# Altium PCB STM32_USB四麦声卡_v6.0（H7 PDM接口）_2022-05-10.pcbdoc
Units mil, origin at the board's own origin, x right, y up, seen from the top; angles counter-clockwise.
Board outline 3650 x 3965.91 mil, 2 copper layers (Top Layer, Bottom Layer); 32 components, 46 nets, 226 pads, 158 vias.
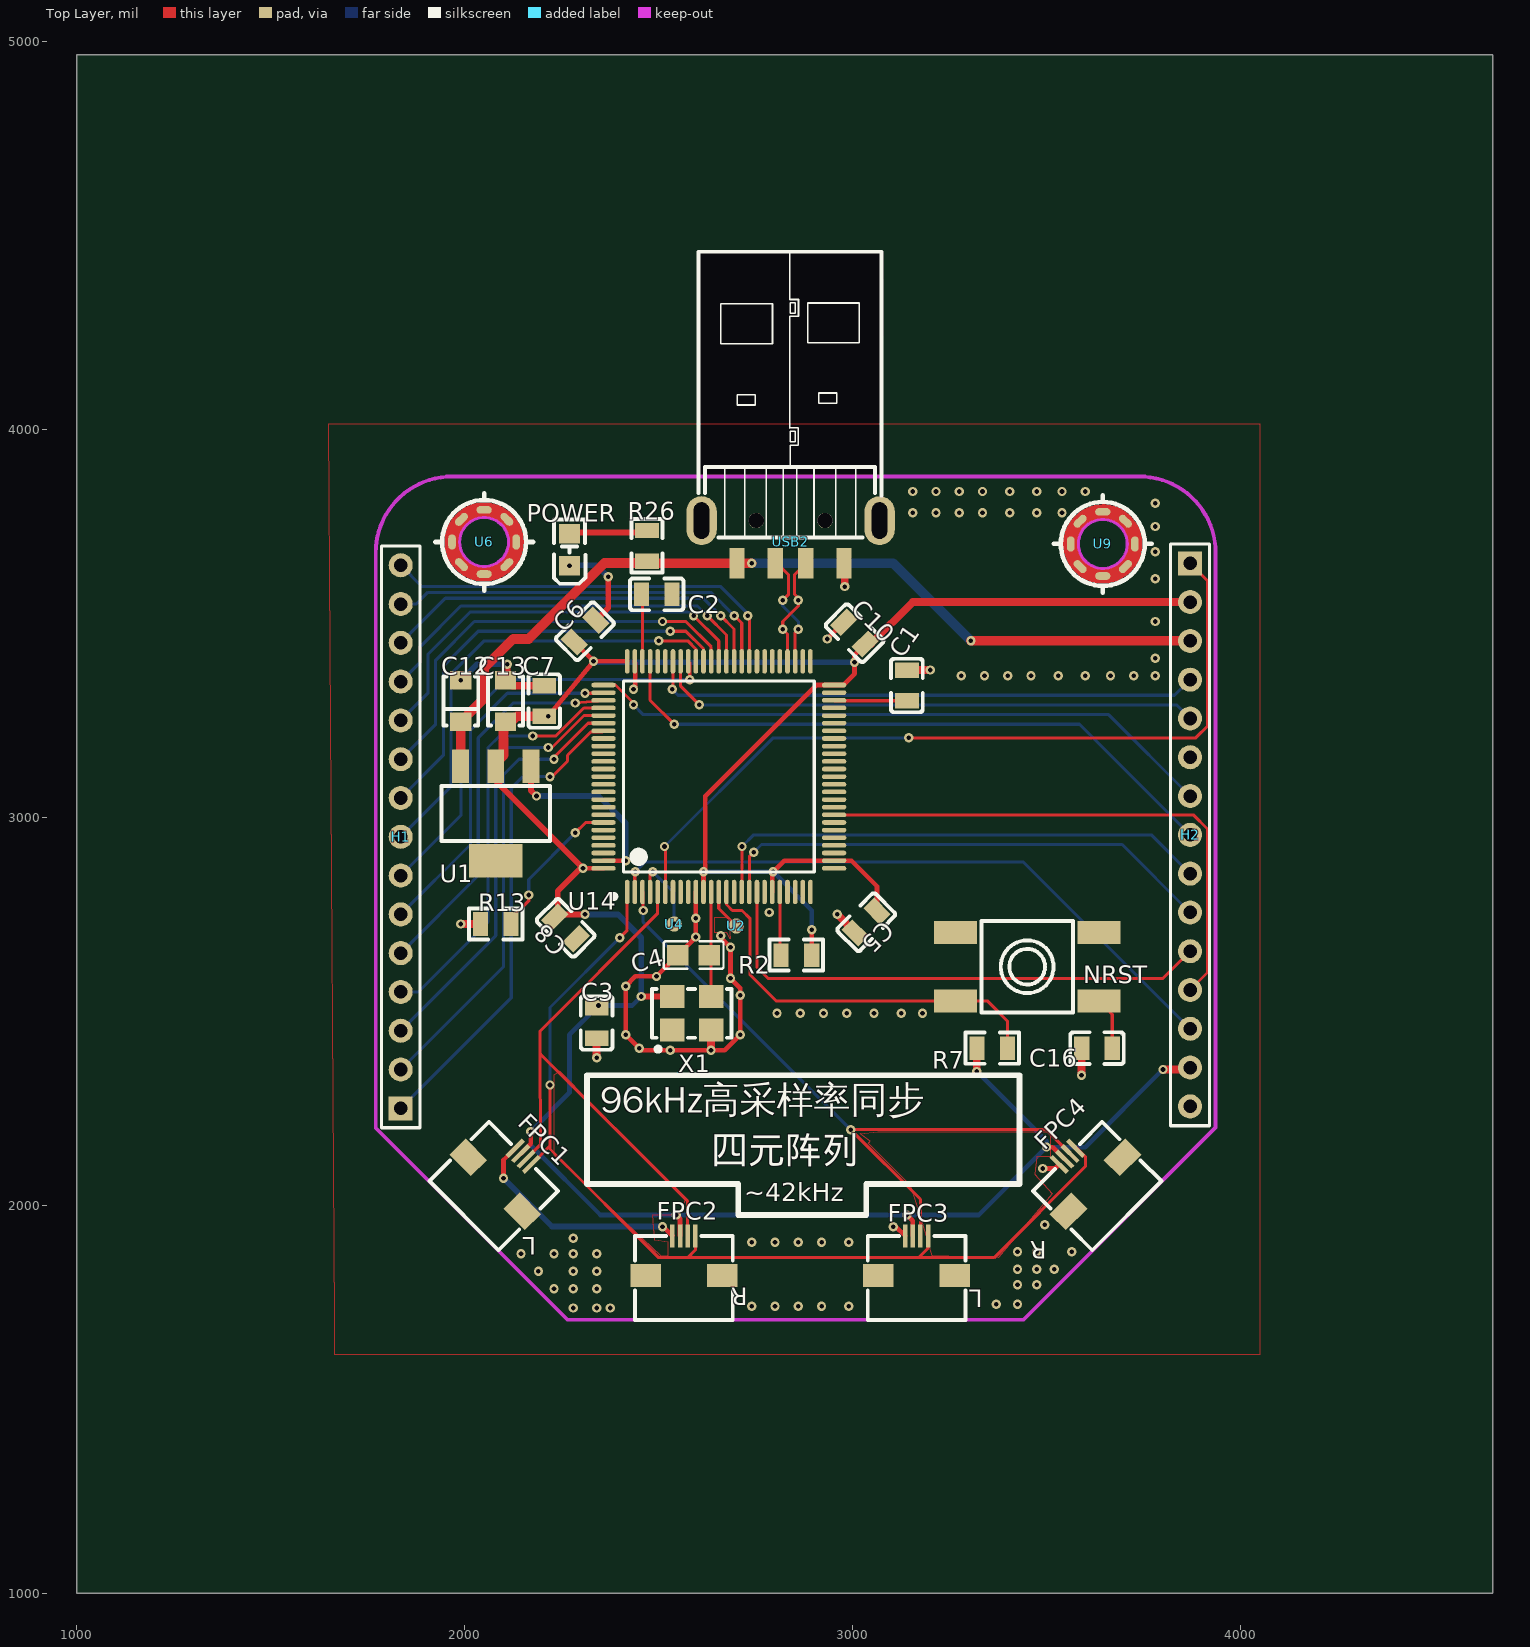
[diagram p0: Top Layer view]
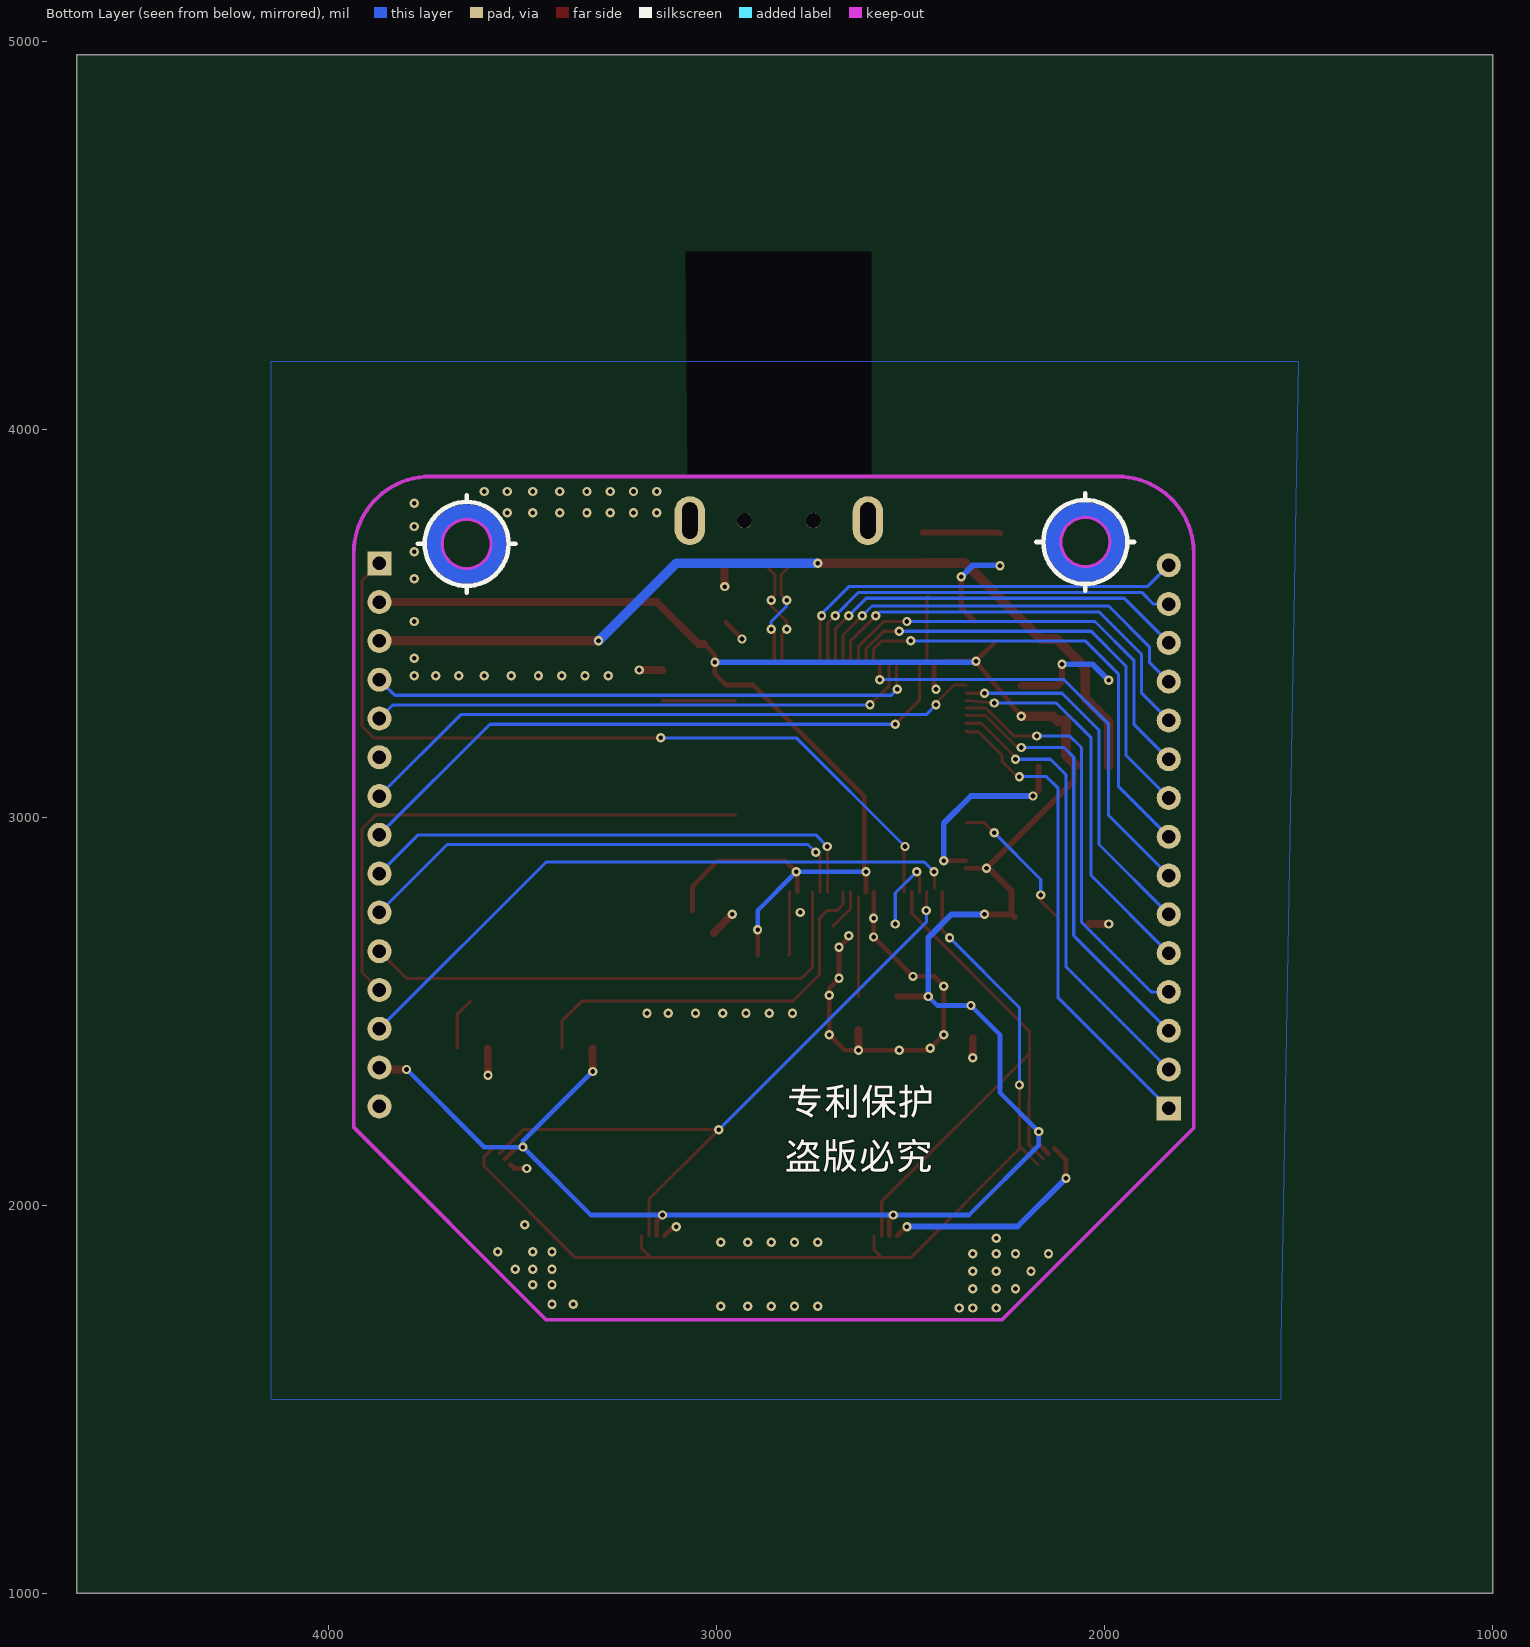
[diagram p1: Bottom Layer view, seen from below]

## Layer stack, top to bottom
Top Layer: signal copper (thickness not stored)
Dielectric: dielectric 12.6, FR-4, Dk 4.8
Bottom Layer: signal copper (thickness not stored)

## Board outline
4650,1000 1000,1000 1000,4965.91 4650,4965.91

## Components (designator, comment, footprint, x,y, rotation, side; value= is the part's Value field where it differs from the comment)
C1 "100nF" C0805#1 3140,3340 r270 top
C2 "100nF" C0805#1 2495,3575 r180 top
C3 "100nF" C0805#1 2340,2470 r90 top
C4 "15pF" C0805#2 2590,2645 r0 top
C5 "100nF" C0805#1 3035,2730 r45 top
C6 "100nF" C0805#1 2310,3480 r225 top
C7 "100nF" C0805#1 2205,3300 r270 top
C8 "100nF" C0805#1 2260,2715 r135 top
C10 "100nF" C0805#1 3005,3475 r315 top
C12 "10uF" CAP-SMD_L3.2-W1.6 1990,3300 r90 top
C13 "10uF" CAP-SMD_L3.2-W1.6 2105,3300 r90 top
C16 "100nF" C0805#1 3630,2405 r0 top
FPC1 "XW05200-04" FPC-SMD_4P-P0.50_XW05200-04 2115,2090 r315 top
FPC2 "XW05200-04" FPC-SMD_4P-P0.50_XW05200-04 2565,1870 r0 top
FPC3 "XW05200-04" FPC-SMD_4P-P0.50_XW05200-04 3165,1870 r0 top
FPC4 "XW05200-04" FPC-SMD_4P-P0.50_XW05200-04 3590,2090 r45 top
H1 "HDR-F-2.54_1x15" HDR-F-2.54_1X15 1835,2950 r90 top
H2 "HDR-F-2.54_1x15" HDR-F-2.54_1X15 3870,2955 r270 top
NRST "TS-1102S-C-E-B" KEY-SMD_4P-L6.0-W6.0-P4.50-LS8.6 3450,2615 r0 top
POWER "Green" LED0805-FD 2270,3690 r270 top
R2 "0" R0805 2855,2645 r180 top
R7 "10K" R0805 3360,2405 r0 top
R13 "10K" R0805 2080,2725 r0 top
R26 "1K" R0805 2470,3700 r270 top
U1 "AMS1117-3.3_C347222" SOT-223_L6.7-W3.5-P2.30-BR 2080,3010 r90 top
U2 "test" TEST 2700,2720 r0 top
U4 "test" TEST 2540,2725 r0 top
U6 "M3" M3-3 2050,3710 r0 top
U9 "M3" M3-3 3645,3705 r0 top
U14 "STM32H743VIT6_C114409" LQFP-100_L14.0-W14.0-P0.50-LS16.0-BL 2655,3105 r0 top
USB2 "U-G-04WS-W-03" USB-A-SMD_U-G-04WS-W-03 2840,3710 r90 top
X1 "24.576MHz" OSC-SMD_4P-L5.0-W3.2-BL_SG5032 2585,2495 r0 top

## Footprints (in the part's own frame and the unit in brackets; to place one, negate y for a bottom-side part, rotate by r counter-clockwise, add the part's x,y. Pads: shape width x height; smd on the part's side, far side on the other; paste and mask are expansions set on the pad)
C0805#1 [mm]
  rect 1x1.55 smd: 1(-1,0) 2(1,0)
  silkscreen extent -1.75,-1.04 1.75,1.04
C0805#2 [mm]
  rect 1.41x1.35 smd: 1(-1.03,0) 2(1.03,0)
  silkscreen extent -1.96,-0.9 1.96,0.9
CAP-SMD_L3.2-W1.6 [mm]
  rect 1.2x1.4 smd: 1(-1.35,0) 2(1.35,0)
  silkscreen extent -1.6,-1.14 1.6,1.14
FPC-SMD_4P-P0.50_XW05200-04 [mm]
  rect 0.3x1.5 smd: 1(0.75,1.3) 2(0.25,1.3) 3(-0.25,1.3) 4(-0.75,1.3)
  rect 2x1.5 smd: 5(-2.5,-1.3) 6(2.5,-1.3)
  silkscreen extent -3.2,-4.2 3.2,1.3
HDR-F-2.54_1X15 [mil]
  rect 62x62 hole 35: 1(-700,0)
  round 62 hole 35: 2(-600,0) 3(-500,0) 4(-400,0) 5(-300,0) 6(-200,0) 7(-100,0) 8(0,0) 9(100,0) 10(200,0) 11(300,0) 12(400,0) 13(500,0) 14(600,0) 15(700,0)
  silkscreen extent -750,-50 750,50
KEY-SMD_4P-L6.0-W6.0-P4.50-LS8.6 [mm]
  rect 2.8x1.5 smd: 1(-4.7,2.25) 2(4.7,2.25) 3(-4.7,-2.25) 4(4.7,-2.25)
  silkscreen extent -3,-3 3,3
LED0805-FD [mil]
  rect 51.2x55.1 smd: 1(-41.35,0) 2(41.35,0)
  silkscreen extent -78,-40 88,41
LQFP-100_L14.0-W14.0-P0.50-LS16.0-BL [mm]
  oval 0.3x1.6 smd: 1(-6,-7.55) 2(-5.5,-7.55) 3(-5,-7.55) 4(-4.5,-7.55) 5(-4,-7.55) 6(-3.5,-7.55) 7(-3,-7.55) 8(-2.5,-7.55) 9(-2,-7.55) 10(-1.5,-7.55) 11(-1,-7.55) 12(-0.5,-7.55) 13(0,-7.55) 14(0.5,-7.55) 15(1,-7.55) 16(1.5,-7.55) 17(2,-7.55) 18(2.5,-7.55) 19(3,-7.55) 20(3.5,-7.55) 21(4,-7.55) 22(4.5,-7.55) 23(5,-7.55) 24(5.5,-7.55) 25(6,-7.55) 51(6,7.55) 52(5.5,7.55) 53(5,7.55) 54(4.5,7.55) 55(4,7.55) 56(3.5,7.55) 57(3,7.55) 58(2.5,7.55) 59(2,7.55) 60(1.5,7.55) 61(1,7.55) 62(0.5,7.55) 63(0,7.55) 64(-0.5,7.55) 65(-1,7.55) 66(-1.5,7.55) 67(-2,7.55) 68(-2.5,7.55) 69(-3,7.55) 70(-3.5,7.55) 71(-4,7.55) 72(-4.5,7.55) 73(-5,7.55) 74(-5.5,7.55) 75(-6,7.55)
  oval 1.6x0.3 smd: 26(7.55,-6) 27(7.55,-5.5) 28(7.55,-5) 29(7.55,-4.5) 30(7.55,-4) 31(7.55,-3.5) 32(7.55,-3) 33(7.55,-2.5) 34(7.55,-2) 35(7.55,-1.5) 36(7.55,-1) 37(7.55,-0.5) 38(7.55,0) 39(7.55,0.5) 40(7.55,1) 41(7.55,1.5) 42(7.55,2) 43(7.55,2.5) 44(7.55,3) 45(7.55,3.5) 46(7.55,4) 47(7.55,4.5) 48(7.55,5) 49(7.55,5.5) 50(7.55,6) 76(-7.55,6) 77(-7.55,5.5) 78(-7.55,5) 79(-7.55,4.5) 80(-7.55,4) 81(-7.55,3.5) 82(-7.55,3) 83(-7.55,2.5) 84(-7.55,2) 85(-7.55,1.5) 86(-7.55,1) 87(-7.55,0.5) 88(-7.55,0) 89(-7.55,-0.5) 90(-7.55,-1) 91(-7.55,-1.5) 92(-7.55,-2) 93(-7.55,-2.5) 94(-7.55,-3) 95(-7.55,-3.5) 96(-7.55,-4) 97(-7.55,-4.5) 98(-7.55,-5) 99(-7.55,-5.5) 100(-7.55,-6)
  silkscreen extent -7.03,-8 6.25,6.25
M3-3 [mm]
  oval 0.5x1 smd: ""(-2.1,0) ""(2.1,0)
  oval 1x0.5 smd rot 45: ""(-1.485,1.485) ""(1.485,-1.485)
  oval 1x0.5 smd rot 135: ""(-1.485,-1.485) ""(1.485,1.485)
  oval 1x0.5 smd: ""(0,2.1) ""(0,-2.1)
  Top Layer circle w1: c0,0 r2.1
  Bottom Layer circle w1: c0,0 r2.1
  Keep-Out Layer circle w0.2: c0,0 r1.6
  silkscreen extent -3.2,-3.2 3.2,3.2
OSC-SMD_4P-L5.0-W3.2-BL_SG5032 [mm]
  rect 1.6x1.5 smd: 1(-1.27,-1.1) 2(1.27,-1.1) 3(1.27,1.1) 4(-1.27,1.1)
  silkscreen extent -2.6,-2.5 2.6,1.6
R0805 [mm]
  rect 1x1.55 smd: 1(-1,0) 2(1,0)
  silkscreen extent -1.75,-1.02 1.75,1.02
SOT-223_L6.7-W3.5-P2.30-BR [mm]
  rect 2.2x1.1 smd: 1(3.099,-2.3) 2(3.099,0) 3(3.099,2.3)
  rect 2.2x3.5 smd: 4(-3.099,0)
  silkscreen extent -1.8,-3.55 1.8,3.55
TEST [mm]
  round 1 smd: 1(0,0)
USB-A-SMD_U-G-04WS-W-03 [mm]
  rect 2x1 smd: 1(-1.4,3.5) 2(-1.4,1) 3(-1.4,-1) 4(-1.4,-3.5)
  oval 3.2x2 hole 1 slot 2.4 at 0 deg: 5(1.4,5.829) 6(1.4,-5.829)
  round 1 hole 1 unplated: ""(1.4,2.25) ""(1.4,-2.25)
  Multi-Layer board cut-out: 4.252,-5.981 4.252,6.043 4.267,6.058 19.002,6.058 19.002,-6.023 19.075,-6.096
  silkscreen extent 0.28,-5.97 19.03,6.03

## Via types
v1: diameter 24, hole 12, Top Layer to Bottom Layer, tented both sides, 158 vias

## Nets (pads, with @x,y where several pads share a name; then routed paths per layer and width w, separated by ;. In a path a pad name is that pad's centre, name@x,y a point inside that pad or via, vN(x,y) a via of type N, cw(c..) or ccw(c..) an arc to the next point about the centre after c; other vN are vias at no path point)
5V_USB: C12.1 H2.3 R26.2 U1.3 USB2.1 | length 2287.8
  Top Layer w25: U1.3@1989.5,3132 1990,3246.9 2050,3306.9 2050,3385 2125,3460 2165,3460 2360.6,3655.6 2470,3655.6 USB2.1@2697.2,3654.9 ; USB2.1 v1(2740,3655) ; v1(3305,3455) H2.3
  Bottom Layer w25: v1(2740,3655) 3105,3655 v1(3305,3455)
+3V3: C3.2 C5.2 C6.2 C7.2 C8.2 C10.2 C13.1 FPC1.3 FPC2.3 FPC3.3 FPC4.3 H2.2 H2.14 R2.1 R7.1 U1.2 U14.11 U14.20 U14.27 U14.50 U14.75 U14.100 X1.4 | length 7962
  Top Layer w12: FPC1.3 2170,2158.9 v1(2170,2190) ; v1(2215,3260.63) v1(2332.08,3402.24) ; C6.2 v1(2332.08,3402.24) ; v1(2305,2868.78) U14.100 ; U14.75 v1(2332.08,3402.24) ; v1(2545,1975) 2555.16,1964.85 FPC2.3 ; U14.11 v1(2615.63,2860) 2620,2864.37 2620,3055 2906.22,3341.22 U14.50 2976.22,3341.22 3005,3370 3005,3419.32 C10.2 ; U14.20 2792.8,2857.8 v1(2795,2860) 2823.46,2888.46 U14.27 ; R2.1 v1(2895,2710) ; U14.27 2997.2,2888.5 3062.8,2822.8 C5.2 ; v1(3140,1975) 3155.16,1959.85 FPC3.3 ; v1(3500,2150) 3516.08,2150 FPC4.3
  Top Layer w15: U1.2 2080,3093.8 v1(2305,2868.78) 2298.78,2868.78 2240,2810 2240,2750.68 C8.2 2239.32,2750 v1(2310,2750) ; v1(2455,2538.31) X1.4
  Top Layer w20: C10.2 3047.2,3447.2 3155,3555 H2.2 ; v1(3320,2345) R7.1 ; v1(3800,2350) 3865,2350 H2.14
  Top Layer w25: U1.2@2075,3135 2100,3160 2100,3249.9 C13.1@2115,3249.9 ; C13.1@2120,3246.85 2133.78,3260.63 v1(2215,3260.63)
  Bottom Layer w12: v1(2455,2538.31) 2431.69,2515 v1(2345,2515) 2270,2440 2270,2290 v1(2170,2190) 2170,2155 2350,1975 v1(2545,1975) v1(3140,1975) 3325,1975 3485,2135 v1(3500,2150) ; v1(2615.63,2860) v1(2795,2860) 2895,2760 v1(2895,2710) ; v1(3320,2345) 3500,2165 v1(3500,2150) ; v1(3800,2350) 3600,2150 v1(3500,2150)
  Bottom Layer w15: v1(2310,2750) 2395,2750 2455,2690 v1(2455,2538.31) ; v1(2332.08,3402.24) 2334.32,3400 v1(3005,3400)
GND: C1.1 C2.1 C3.1 C4.1 C5.1 C6.1 C7.1 C8.1 C10.1 C12.2 C13.2 C16.1 FPC1.4 FPC2.4 FPC3.4 FPC4.4 H2.6 H2.15 NRST.1 NRST.2 POWER.2 R13.1 U1.1 U14.10 U14.19 U14.26 U14.49 U14.74 U14.99 USB2.4 USB2.5 USB2.6 X1.2 | length 3322.6
  Top Layer w12: v1(2100,2070) 2100,2116.76 FPC1.4 ; U14.99 v1(2415,2888.46) ; v1(2435,3330) 2440,3335 2440,3350 2440,3395 U14.74 ; v1(2510,1945) 2511.65,1945 FPC2.4 ; U14.10 v1(2595.94,2739.83) v1(2595.94,2691.49) C4.1 v1(2494.45,2590) 2440,2590 v1(2415,2565) 2415,2505 v1(2415,2440) 2455,2400 v1(2529.54,2400) v1(2635,2400) 2670,2400 v1(2710,2440) v1(2710,2541.79) 2710,2560 v1(2685,2585) v1(2685,2665) 2660,2690 v1(2660,2695) ; v1(2935,3460) C10.1 ; v1(3105,1945) 3111.65,1945 FPC3.4 ; v1(3490,2095) 3522.62,2095 FPC4.4
  Top Layer w15: C13.2@2110,3353.15 v1(2110,3395) ; U1.1 2170.55,3069.45 v1(2185,3055) ; C6.1 2370,3540 v1(2370,3620)
  Top Layer w20: v1(1990,2725) R13.1 ; C13.2@2110,3353.15 2123.78,3339.37 C7.1@2215,3339.37 ; v1(2340,2380) C3.1 ; v1(2635,2400) X1.2 ; v1(2960,2750) C5.1 ; USB2.4 2980,3652.67 v1(2980,3595) ; C1.1 3140.63,3380 v1(3200,3380) ; v1(3590,2335) C16.1
  Bottom Layer w15: v1@1990,3353.15 2031.85,3395 v1(2110,3395) ; v1(2100,2070) 2225,1945 v1(2510,1945) ; v1(2185,3055) 2345,3055 2415,2985 v1(2415,2888.46) ; v1(2270,3648.65) 2271.35,3650 2340,3650 v1(2370,3620)
  other v1: 2280,1735 2340,1735 2375,1735 2740,1740 2800,1740 2860,1740 2920,1740 2990,1740 3370,1745 3425,1745 2230,1785 2280,1785 2340,1785 3425,1795 3475,1795 2190,1830 2280,1830 2340,1830 3425,1835 3475,1835 3520,1835 2145,1875 2230,1875 2280,1875 2340,1875 3425,1880 3475,1880 3565,1880 2740,1905 2800,1905 2860,1905 2920,1905 2990,1905 2280,1915 3495,1950 2450,2405 2805,2495 2865,2495 2925,2495 2985,2495 3055,2495 3125,2495 3180,2495 2785,2755 1990,3353.15 3280,3365 3340,3365 3400,3365 3460,3365 3530,3365 3600,3365 3665,3365 3725,3365 3780,3365 3780,3410 3780,3505 3780,3615 3780,3685 3780,3750 3155,3785 3215,3785 3275,3785 3335,3785 3405,3785 3475,3785 3540,3785 3780,3810 3155,3840 3215,3840 3275,3840 3335,3840 3405,3840 3475,3840 3540,3840 3600,3840
NRST: NRST.3 R7.2 U14.14 | length 1036.5
  Top Layer w8: U14.14 2674.7,2775.3 2690,2760 2715,2760 2735,2740 2735,2595 2803.6,2526.4 NRST.3 3348.6,2526.4 3399.4,2474.4 R7.2
NRST_4: C16.2 NRST.4 | length 135.6
  Top Layer w8: NRST.4 3669.37,2492.08 C16.2
OSC_CLK: C4.2 U14.12 X1.3 | length 256.7
  Top Layer w8: X1.3 U14.12@2635,2795
OSC_CLK-OUT: U2.1 U14.13 | length 106.4
  Top Layer w8: U14.13 2655,2765 U2.1
PA8: H1.7 U14.67 | length 1140.6
  Top Layer w8: U14.67 2580,3398.5 v1(2580,3355)
  Bottom Layer w8: H1.7 1990,3005 1990,3240 2105,3355 v1(2580,3355)
PA15: H1.6 U14.77 | length 932.3
  Top Layer w8: v1(2310,3320) 2356.22,3320 U14.77
  Bottom Layer w8: H1.6 2015,2930 2015,3225 2110,3320 v1(2310,3320)
PC1: H2.9 U14.16 | length 1326.5
  Top Layer w8: U14.16 2715,2808.7 v1(2715,2925)
  Bottom Layer w8: v1(2715,2925) 2745,2955 3770,2955 H2.9
PC2_C: H2.10 U14.17 | length 1312.7
  Top Layer w8: U14.17 2733.74,2898.74 v1(2745,2910)
  Bottom Layer w8: v1(2745,2910) 2765,2930 3695,2930 H2.10
PC3_C: H2.11 U14.18 | length 1351.7
  Top Layer w8: U14.18 2753.4,2613.4 2781.9,2585 3800,2585 H2.11
PC5: H2.12 U14.33 | length 1411.5
  Top Layer w8: U14.33 3878.43,3006.57 3915,2970 3915,2600 H2.12
PC6: H1.11 U14.63 | length 1078.4
  Top Layer w8: v1(2590,3520) 2655,3455 U14.63
  Bottom Layer w8: H1.11 1905,3320 1905,3420 2015,3530 2580,3530 v1(2590,3520)
PC7: H1.10 U14.64 | length 1108.5
  Top Layer w8: v1(2510,3505) 2570,3505 2635.3,3439.7 U14.64
  Bottom Layer w8: H1.10 1925,3240 1925,3405 2025,3505 v1(2510,3505)
PC8: H1.9 U14.65 | length 1144.5
  Top Layer w8: v1(2530,3480) 2570,3480 2615.63,3434.37 U14.65
  Bottom Layer w8: H1.9 1945,3160 1945,3390 2035,3480 v1(2530,3480)
PC9: H1.8 U14.66 | length 1180.5
  Top Layer w8: v1(2500,3455) 2575,3455 2595.9,3434.1 U14.66
  Bottom Layer w8: H1.8 1965,3080 1965,3370 2050,3455 v1(2500,3455)
PC10: H1.5 U14.78 | length 998.2
  Top Layer w8: v1(2285,3295) U14.78
  Bottom Layer w8: H1.5 2035,2850 2035,3205 2125,3295 v1(2285,3295)
PC11: H1.4 U14.79 | length 1089.7
  Top Layer w8: v1(2175,3210) 2235,3210 2307.2,3282.2 U14.79
  Bottom Layer w8: H1.4 1880,2550 2060,2730 2060,3180 2090,3210 v1(2175,3210)
PC12: H1.3 U14.80 | length 1128.8
  Top Layer w8: v1(2215,3180) 2225,3180 2307.5,3262.5 U14.80
  Bottom Layer w8: H1.3 2080,2695 2080,3155 2105,3180 v1(2215,3180)
PD0: H1.2 U14.81 | length 1185.5
  Top Layer w8: v1(2230,3150) 2230,3155 2317.8,3242.8 U14.81
  Bottom Layer w8: H1.2 2100,2615 2100,3110 2140,3150 v1(2230,3150)
PD1: H1.1 U14.82 | length 1251
  Top Layer w8: v1(2220,3105) 2225,3105 2265,3145 2265,3160 2325,3220 2354.6,3220 U14.82
  Bottom Layer w8: H1.1 2120,2535 2120,3075 2150,3105 v1(2220,3105)
PD12: H1.15 U14.59 | length 1073.3
  Top Layer w8: v1(2730,3520) 2733.74,3520 U14.59
  Bottom Layer w8: H1.15 1890,3595 2660,3595 2730,3525 v1(2730,3520)
PD13: H1.14 U14.60 | length 1022.9
  Top Layer w8: v1(2695,3520) 2714.06,3500.94 U14.60
  Bottom Layer w8: H1.14 1875,3550 1905,3580 2635,3580 v1(2695,3520)
PD14: H1.13 U14.61 | length 1023.3
  Top Layer w8: v1(2660,3520) 2694.37,3485.63 U14.61
  Bottom Layer w8: H1.13 1950,3565 2615,3565 v1(2660,3520)
PD15: H1.12 U14.62 | length 1042.9
  Top Layer w8: v1(2625,3520) 2674.69,3470.31 U14.62
  Bottom Layer w8: H1.12 1885,3400 1885,3440 1990,3545 2600,3545 v1(2625,3520)
PE3: H2.13 U14.2 | length 1661.4
  Top Layer w8: U14.2@2438.46,2817.69 2438.46,2858.46 v1(2440,2860)
  Bottom Layer w8: v1(2440,2860) 2465,2885 3440,2885 H2.13
POWER_1: POWER.1 R26.1 | length 201.3
  Top Layer w15: POWER.1 2273.02,3734.37 R26.1@2470,3734.37
S$2641: 
S$2644: 
S$4499: 
SAI1_CK1: FPC1.1 FPC2.1 FPC3.1 FPC4.1 U14.1 | length 2753
  Top Layer w8: FPC1.1 2220,2153.24 v1(2220,2310) 2220,2145 2500,1865 2575,1865 ; v1(2400,2690) 2418.78,2708.78 U14.1 ; FPC2.1 2594.5,1884.5 2575,1865 ; FPC3.1 3194.53,1889.53 3170,1865 ; FPC4.1 3577.9,2147.1 3600,2125 3600,2100 3365,1865 3170,1865 ; 2575,1865 3170,1865
  Bottom Layer w8: v1(2220,2310) 2220,2510 v1(2400,2690)
SAI1_CK2: U4.1 U14.4 | length 213
  Top Layer w8: U14.4 2477.83,2852.83 v1(2485,2860)
  Bottom Layer w8: v1(2485,2860) 2540,2805 v1(2540,2725)
SAI1_D1: FPC1.2 FPC2.2 U14.5 | length 1459
  Top Layer w8: FPC1.2 2195,2156 2194.32,2393.35 ; U14.5 2497.5,2752.5 2194.32,2449.32 2194.32,2393.35 ; FPC2.2 2574.8,2010.2 2195,2390 2194.32,2393.35
SAI1_D2: FPC3.2 FPC4.2 U14.3 | length 1774.8
  Top Layer w8: U14.3@2458.15,2807.76 2460,2805.91 v1(2460,2760) ; FPC3.2 3174.84,2015.16 v1(2995,2195) 3498.92,2195 FPC4.2
  Bottom Layer w8: v1(2460,2760) 2460,2730 v1(2995,2195)
SWCLK: H2.7 U14.76 | length 1633.7
  Top Layer w8: U14.76 2388.8,3341.2 2435,3295 v1(2435,3290)
  Bottom Layer w8: v1(2435,3290) 2460,3265 3660,3265 H2.7
SWDIO: H2.8 U14.72 | length 1636
  Top Layer w8: U14.72 2477.83,3302.17 v1(2540,3240)
  Bottom Layer w8: v1(2540,3240) 3585,3240 H2.8
U14_21: R2.2 U14.21 | length 165.9
  Top Layer w8: U14.21 2812.5,2645 R2.2
U14_48: C1.2 U14.48 | length 188.3
  Top Layer w8: U14.48 2953.46,3300.63 C1.2
U14_73: C2.2 U14.73 | length 168.8
  Top Layer w8: C2.2@2455.63,3570 2458.15,3567.48 U14.73
U14_94: R13.2 U14.94 | length 387.5
  Top Layer w8: R13.2 2119.37,2739.37 2165,2785 v1(2165,2800) ; v1(2285,2960) 2311.89,2986.89 U14.94
  Bottom Layer w8: v1(2165,2800) 2165,2840 v1(2285,2960)
USART1_RX: H2.4 U14.69 | length 1430.8
  Top Layer w8: v1(2535,3330) 2536.89,3331.89 U14.69
  Bottom Layer w8: v1(2535,3330) 2550,3315 3830,3315 H2.4
USART1_TX: H2.5 U14.68 | length 1411.7
  Top Layer w8: U14.68 2556.6,3338.4 v1(2605,3290)
  Bottom Layer w8: v1(2605,3290) 3835,3290 H2.5
USB_OTG_HS_DM: U14.53 USB2.2 | length 295.7
  Top Layer w8: USB2.2 2805.1,3654.9 2835,3625 2835,3575 v1(2820,3560) ; U14.53@2851.9,3402.2 2851.9,3476.9 v1(2860,3485)
  Bottom Layer w8: v1(2820,3560) 2820,3545 2860,3505 v1(2860,3485)
USB_OTG_HS_DP: U14.54 USB2.3 | length 290.6
  Top Layer w8: U14.54 2832.17,3472.83 v1(2820,3485) 2820,3505 2860,3545 v1(2860,3560) 2860,3565 2850,3575 2850,3625.5 USB2.3
VBAT: H2.1 U14.6 | length 2085.2
  Top Layer w8: v1(2515,2925) 2517.2,2922.8 U14.6 ; v1(3145,3205) 3885,3205 3915,3235 3915,3610 H2.1
  Bottom Layer w8: v1(2515,2925) 2795,3205 v1(3145,3205)
pads on no net: FPC1.5 FPC1.6 FPC2.5 FPC2.6 FPC3.5 FPC3.6 FPC4.5 FPC4.6 U1.4 U6. U9. U14.7 U14.8 U14.9 U14.15 U14.22 U14.23 U14.24 U14.25 U14.28 U14.29 U14.30 U14.31 U14.32 U14.34 U14.35 U14.36 U14.37 U14.38 U14.39 U14.40 U14.41 U14.42 U14.43 U14.44 U14.45 U14.46 U14.47 U14.51 U14.52 U14.55 U14.56 U14.57 U14.58 U14.70 U14.71 U14.83 U14.84 U14.85 U14.86 U14.87 U14.88 U14.89 U14.90 U14.91 U14.92 U14.93 U14.95 U14.96 U14.97 U14.98 USB2. X1.1

## Polygon pours and split planes (outlines as drawn)
GND on Bottom Layer (solid): 1500,4175 4150,4175 4150,1500 1545,1500 1545,1645
GND on Top Layer (solid): 2645,2742.5 2680,2742.5 2685,2687.5 2675,2702.5 2645,2702.5 2645,2737.5
GND on Top Layer (solid): 2230,2335 2230,2130 2505,1870 2525,1870 2525,1905 2490,1910 2485,1975 2530,1975 2560,1990 2570,2015 2245,2345 2230,2335
GND on Top Layer (solid): 3020,2185 3065,2190 3510,2190 3510,2125 3475,2125 3470,2080 3515,2030 3375,1865 3205,1870 3175,1975 3150,2050 3040,2160 3045,2165
GND on Top Layer (solid): 1650,4015 4050,4015 4050,1615 1665,1615 1665,1705

## Keep-outs
Keep-Out Layer:
  lines w10: 1770.59,3682.05 cw(c1967.44,3682.05) 1967.44,3878.9 ; 3739.09,3878.9 cw(c3739.09,3682.05) 3935.94,3682.05

## Silkscreen, mask and mechanical layers (free items; w line width, h text height)
Top Overlay:
  lines w15 net S$4499: 2315,2055 2315,2335 3430,2335 3430,2055 3035,2055 3035,1975 2705,1975 2705,2055 2315,2055
  text "96kHz高采样率同步" at 2350,2215 h120
  text "四元阵列" at 2635,2085 h120
  text "~42kHz" at 2720,1995 h80
  text "L" at 2185,1917.5 h45 r180
  text "R" at 3500,1907.5 h45 r180
  text "R" at 2730,1787.5 h45 r180
  text "L" at 3335,1782.5 h45 r180
Bottom Overlay:
  text "专利保护" at 2820,2210 h120
  text "盗版必究" at 2825,2070 h120
Top Solder:
  text "汪志胜设计" at 3145,3060 h120
  text "电话：15779416071" at 3125,2925 h65
  text "微信：a13647023361" at 3125,2855 h65
  text "B站：爱折腾的布鲁斯" at 3145,2780 h65